# Allegro board backup.brd
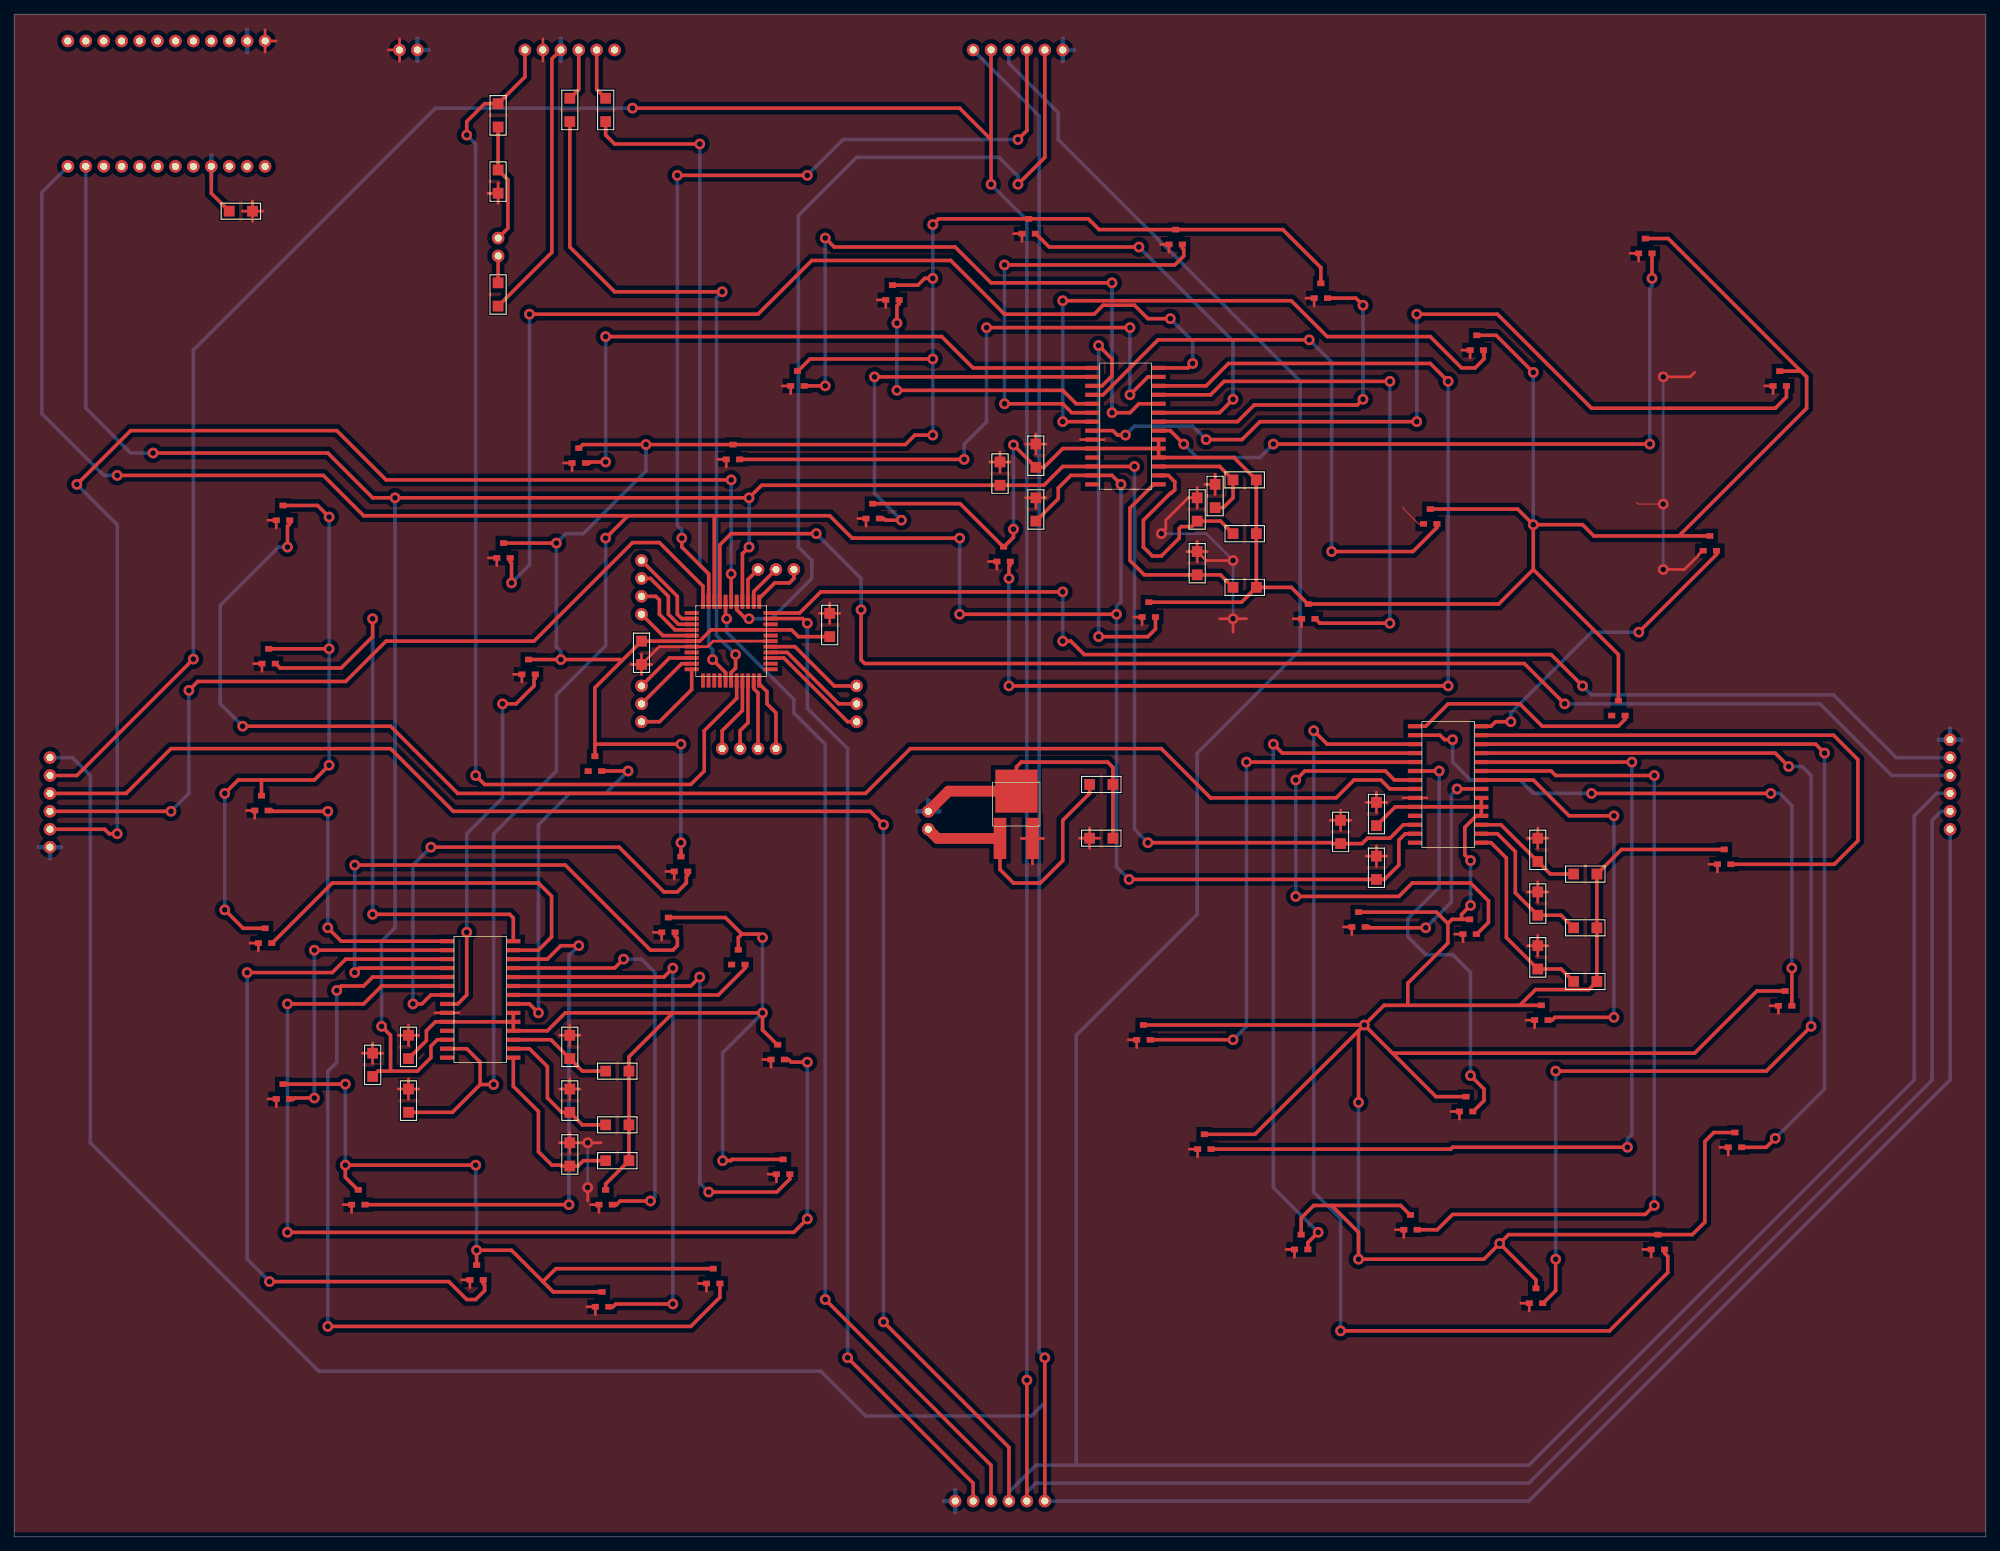
[diagram p0: board, top side]
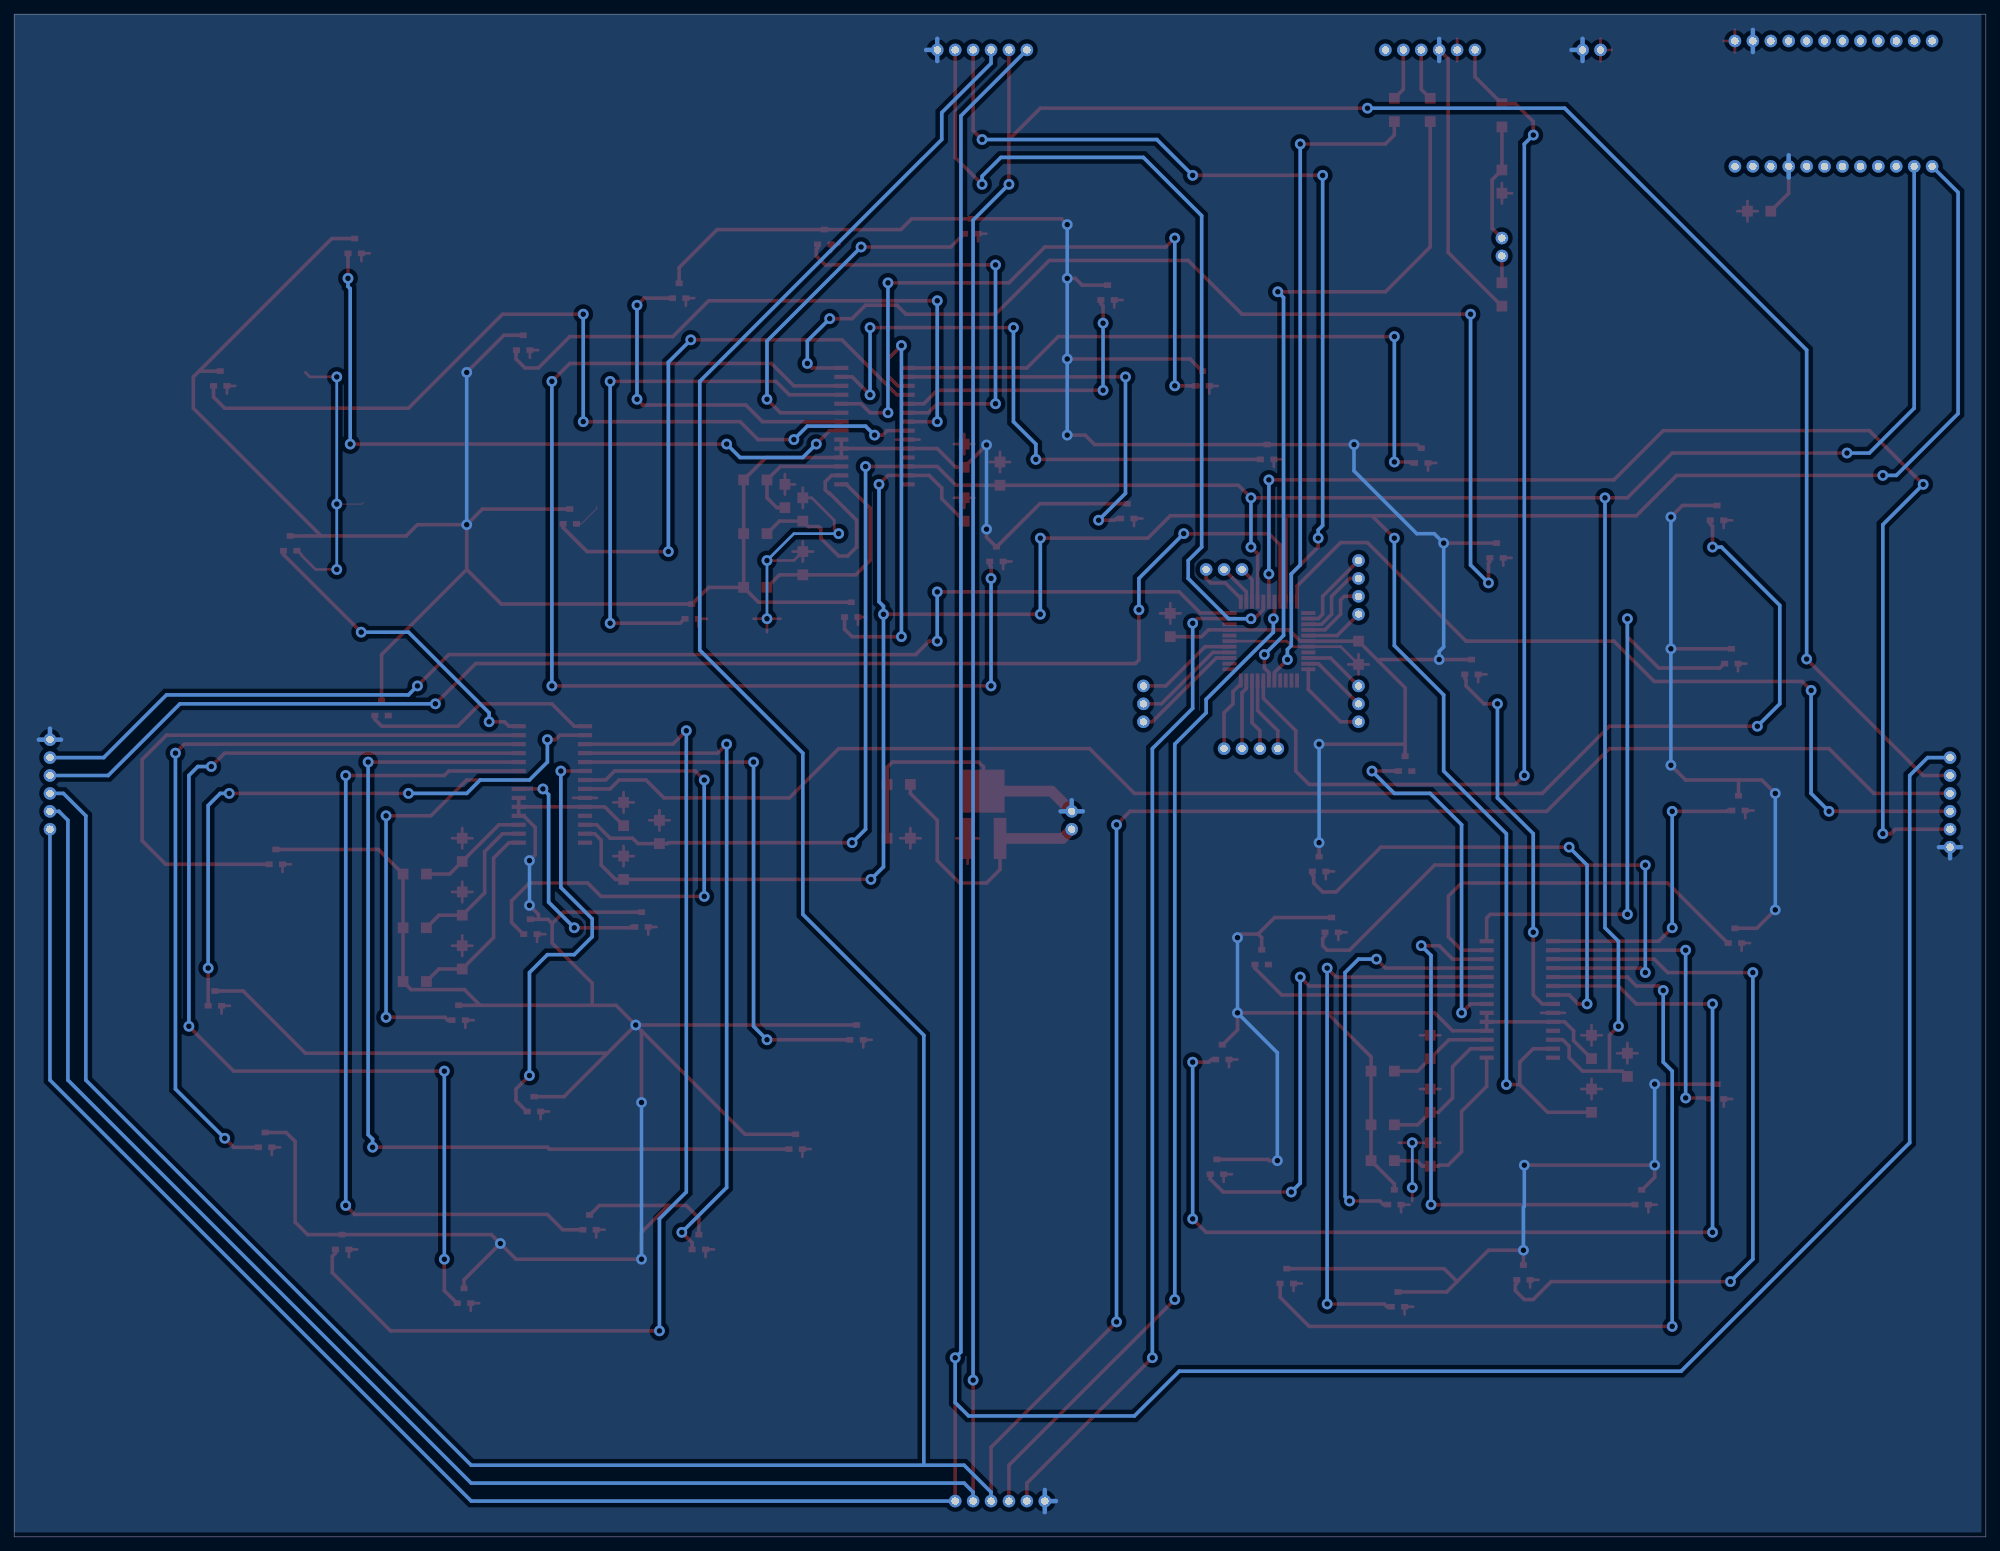
[diagram p1: board, bottom side, seen from below]

Outline 279.4 x 215.9 mm; copper layers: TOP, BOTTOM. Coordinates in mm from the lower left corner of the outline.
Outline path: 0,215.9 0,0 279.4,0 279.4,215.9 0,215.9

## Placement (name value [footprint] x y rotation side)
BT1  7.2V  [HEADER1X2]  129.54 101.6 180 top
C1  0.1 uF, 15V  [SMC1206]  115.57 127.64 90 top
C2  0.1 uF, 15V  [SMC1206]  88.9 127 270 top
C3  0.1uF  [SMC1206]  30.48 187.96 0 top
C4  0.1 uF, 15V  [SMC1206]  193.04 104.14 270 top
C5  0.1 uF, 15V  [SMC1206]  144.78 154.94 270 top
C6  0.1 uF, 15V  [SMC1206]  55.88 71.12 270 top
C7  0.1uF, 15V  [SMC1206]  152.4 106.68 0 top
C8  0.1uF, 15V  [SMC1206]  152.4 99.06 0 top
C9  0.1 uF, 15V  [SMC1206]  68.58 177.8 270 top
J1  CON3  [HEADER1X3]  106.68 137.16 90 top
J2  CON4  [HEADER1X4]  88.9 132.08 180 top
J3  CON3  [HEADER1X3]  119.38 119.38 0 top
J4  CON3  [HEADER1X3]  88.9 116.84 180 top
J5  CON4  [HEADER1X4]  106.68 111.76 270 top
J6  CON6  [HEADER1X6]  73.66 210.82 90 top
J7  JUMPER  [HEADER1X2]  68.58 182.88 180 top
J8  CON2  [HEADER1X2]  55.88 210.82 90 top
J9  Board Connector  [HEADER1X6]  5.08 109.22 0 top
J10  Board Connector  [HEADER1X6]  137.16 210.82 90 top
J11  Board Connector  [HEADER1X6]  274.32 101.6 180 top
J12  Board Connector  [HEADER1X6]  144.78 5.08 270 top
R1  22 ohm, 1/4W  [SMR1206]  83.82 200.66 90 top
R2  22 ohm, 1/4W  [SMR1206]  78.74 200.66 90 top
R3  10 kohm, 1/4W  [SMR1206]  68.58 190.5 90 top
R4  1 kohm, 1/4W  [SMR1206]  187.96 101.6 270 top
R5  1 kohm, 1/4W  [SMR1206]  139.7 152.4 270 top
R6  1 kohm, 1/4W  [SMR1206]  50.8 68.58 270 top
R7  220 ohm, 1/4W  [SMR1206]  68.58 203.2 270 top
R8  1 kohm, 1/4W  [SMR1206]  193.04 96.52 270 top
R9  1 kohm, 1/4W  [SMR1206]  144.78 147.32 270 top
R10  1 kohm, 1/4W  [SMR1206]  55.88 63.5 270 top
R11  1 kohm, 1/4W  [SMR1206]  215.9 99.06 270 top
R12  1 kohm, 1/4W  [SMR1206]  170.18 149.22 270 top
R13  1 kohm, 1/4W  [SMR1206]  78.74 71.12 270 top
R14  0 ohm, 1/4W  [SMR1206]  220.98 93.98 0 top
R15  0 ohm, 1/4W  [SMR1206]  172.72 149.86 0 top
R16  0 ohm, 1/4W  [SMR1206]  83.82 66.04 0 top
R17  1 kohm, 1/4W  [SMR1206]  215.9 91.44 270 top
R18  1 kohm, 1/4W  [SMR1206]  167.64 147.32 270 top
R19  1 kohm, 1/4W  [SMR1206]  78.74 63.5 270 top
R20  0 ohm, 1/4W  [SMR1206]  220.98 86.36 0 top
R21  0 ohm, 1/4W  [SMR1206]  172.72 142.24 0 top
R22  100 kohm, 1/4W  [SMR1206]  83.82 58.42 0 top
R23  1 kohm, 1/4W  [SMR1206]  215.9 83.82 270 top
R24  1 kohm, 1/4W  [SMR1206]  167.64 139.7 270 top
R25  1 kohm, 1/4W  [SMR1206]  78.74 55.88 270 top
R26  0 ohm, 1/4W  [SMR1206]  220.98 78.74 0 top
R27  100 kohm, 1/4W  [SMR1206]  172.72 134.62 0 top
R28  0 ohm, 1/4W  [SMR1206]  83.82 53.34 0 top
U1  -  [TCS40DPR]  38.1 145.03 0 top
U2  -  [TCS40DPR]  190.5 87.38 0 top
U3  -  [TCS40DPR]  250.19 164.08 0 top
U4  -  [TCS40DPR]  231.14 182.88 0 top
U5  -  [TCS40DPR]  72.9 123.19 0 top
U6  -  [TCS40DPR]  82.3 109.47 0 top
U7  -  [TCS40DPR]  206.25 86.36 0 top
U8  -  [TCS40DPR]  216.41 74.17 0 top
U9  -  [TCS40DPR]  207.26 169.16 0 top
U10  -  [TCS40DPR]  185.17 176.53 0 top
U11  -  [TCS40DPR]  94.49 95.25 0 top
U12  -  [TCS40DPR]  102.62 82.04 0 top
U13  PIC18F47K40-I/PT  [TQFPPIC18F47K40]  101.6 127 0 top
U14  -  [TCS40DPR]  205.74 61.21 0 top
U15  -  [TCS40DPR]  197.87 44.45 0 top
U16  -  [TCS40DPR]  164.59 184.15 0 top
U17  -  [TCS40DPR]  143.76 185.67 0 top
U18  -  [TCS40DPR]  108.2 68.58 0 top
U19  -  [TCS40DPR]  108.97 52.32 0 top
U20  -  [TCS40DPR]  160.02 71.37 0 top
U21  -  [TCS40DPR]  168.66 55.88 0 top
U22  -  [TCS40DPR]  124.46 176.28 0 top
U23  -  [TCS40DPR]  111 164.08 0 top
U24  -  [TCS40DPR]  99.06 36.83 0 top
U25  -  [TCS40DPR]  83.31 33.53 0 top
U26  -  [TCS40DPR]  182.37 41.66 0 top
U27  -  [TCS40DPR]  215.65 34.04 0 top
U28  -  [TCS40DPR]  200.66 144.53 0 top
U29  -  [TCS40DPR]  183.39 131.06 0 top
U30  -  [TCS40DPR]  92.71 86.61 0 top
U31  -  [TCS40DPR]  83.82 48.01 0 top
U32  -  [TCS40DPR]  232.92 41.66 0 top
U33  -  [TCS40DPR]  243.84 56.13 0 top
U34  -  [TCS40DPR]  160.78 131.32 0 top
U35  -  [TCS40DPR]  140.21 139.19 0 top
U36  -  [TCS40DPR]  65.53 37.34 0 top
U37  -  [TCS40DPR]  48.77 48.01 0 top
U38  -  [TCS40DPR]  250.95 76.2 0 top
U39  -  [TCS40DPR]  242.32 96.27 0 top
U40  -  [TCS40DPR]  121.67 145.29 0 top
U41  -  [TCS40DPR]  101.85 153.67 0 top
U42  -  [TCS40DPR]  38.1 62.99 0 top
U43  -  [TCS40DPR]  35.56 85.09 0 top
U45  -  [TCS40DPR]  227.33 117.35 0 top
U46  -  [TCS40DPR]  240.28 140.72 0 top
U47  -  [TCS40DPR]  80.01 153.16 0 top
U48  -  [TCS40DPR]  69.34 139.7 0 top
U49  -  [TCS40DPR]  35.05 103.89 0 top
U50  -  [TCS40DPR]  36.07 124.71 0 top
U51  MCP23017T  [MCP23017]  203.2 106.68 0 top
U52  MCP23017T  [MCP23017]  157.48 157.48 0 top
U53  MCP23017T  [MCP23017]  66.04 76.2 0 top
U54  MIC29310-5.0WU  [TO252AA]  139.7 99.06 0 top
U57  Photon  [PHOTONFOOTPRINT]  15.24 203.2 90 top

## Library data of the parts
BT1 = BATTERY
C1-C9 = CAP NP
J1 J3 J4 = CON3
J2 J5 = CON4
J6 = CON6
J7 = JUMPER
J8 = CON2
J9-J12 = Board Connector
R1-R28 = R
U1-U12 U14-U43 U45-U50 = TCS40DPR
U13 = PIC18F47K40-I/PT_0
U51-U53 = MCP23017T
U54 = MIC29310-5.0WU
U57 = Photon

## Footprints (pads in the part's own frame, mm; a bottom-side part is the same pattern mirrored in y, then rotated)
HEADER1X2
  round 1.778 hole 1.016: 1(0,1.27) 2(0,-1.27)
HEADER1X3
  round 1.778 hole 1.016: 1(0,1.27) 2(0,-1.27) 3(0,-3.81)
HEADER1X4
  round 1.778 hole 1.016: 1(0,1.27) 2(0,-1.27) 3(0,-3.81) 4(0,-6.35)
HEADER1X6
  round 1.778 hole 1.016: 1(0,1.27) 2(0,-1.27) 3(0,-3.81) 4(0,-6.35) 5(0,-8.89) 6(0,-11.43)
MCP23017
  rect 2x0.6 smd: 1(-4.699,8.255) 2(-4.699,6.985) 3(-4.699,5.715) 4(-4.699,4.445) 5(-4.699,3.175) 6(-4.699,1.905) 7(-4.699,0.635) 8(-4.699,-0.635) 9(-4.699,-1.905) 10(-4.699,-3.175) 11(-4.699,-4.445) 12(-4.699,-5.715) 13(-4.699,-6.985) 14(-4.699,-8.255) 15(4.699,-8.255) 16(4.699,-6.985) 17(4.699,-5.715) 18(4.699,-4.445) 19(4.699,-3.175) 20(4.699,-1.905) 21(4.699,-0.635) 22(4.699,0.635) 23(4.699,1.905) 24(4.699,3.175) 25(4.699,4.445) 26(4.699,5.715) 27(4.699,6.985) 28(4.699,8.255)
PHOTONFOOTPRINT
  round 1.778 hole 1.016: 1(8.89,7.62) 2(8.89,5.08) 3(8.89,2.54) 4(8.89,0) 5(8.89,-2.54) 6(8.89,-5.08) 7(8.89,-7.62) 8(8.89,-10.16) 9(8.89,-12.7) 10(8.89,-15.24) 11(8.89,-17.78) 12(8.89,-20.32) 13(-8.89,7.62) 14(-8.89,5.08) 15(-8.89,2.54) 16(-8.89,0) 17(-8.89,-2.54) 18(-8.89,-5.08) 19(-8.89,-7.62) 20(-8.89,-10.16) 21(-8.89,-12.7) 22(-8.89,-15.24) 23(-8.89,-17.78) 24(-8.89,-20.32)
SMC1206
  rect 1.524x1.524 smd: 1(0,0) 2(3.302,0)
SMR1206
  rect 1.524x1.524 smd: 1(0,0) 2(3.302,0)
TCS40DPR
  rect 1x0.8 smd: 1(-0.95,-0.9) 2(0.95,-0.9) 3(0,1.2)
TO252AA
  rect 1.778x5.842 smd: 1(-0.004,-0.034) 3(4.596,-0.034)
  rect 5.969x6.096 smd: 2(2.332,6.673)
TQFPPIC18F47K40
  rect 2x0.55 smd: 1(-5.588,3.988) 2(-5.588,3.2) 3(-5.588,2.388) 4(-5.588,1.6) 5(-5.588,0.787) 6(-5.588,0) 7(-5.588,-0.787) 8(-5.588,-1.6) 9(-5.588,-2.388) 10(-5.588,-3.2) 11(-5.588,-3.988) 23(5.588,-3.988) 24(5.588,-3.2) 25(5.588,-2.388) 26(5.588,-1.6) 27(5.588,-0.787) 28(5.588,0) 29(5.588,0.787) 30(5.588,1.6) 31(5.588,2.388) 32(5.588,3.2) 33(5.588,3.988)
  rect 0.55x2 smd: 12(-3.988,-5.588) 13(-3.2,-5.588) 14(-2.388,-5.588) 15(-1.6,-5.588) 16(-0.787,-5.588) 17(0,-5.588) 18(0.787,-5.588) 19(1.6,-5.588) 20(2.388,-5.588) 21(3.2,-5.588) 22(3.988,-5.588) 34(3.988,5.588) 35(3.2,5.588) 36(2.388,5.588) 37(1.6,5.588) 38(0.787,5.588) 39(0,5.588) 40(-0.787,5.588) 41(-1.6,5.588) 42(-2.388,5.588) 43(-3.2,5.588) 44(-3.988,5.588)

## Nets
GND: BT1.2(-) C1.1 C2.1 C3.1 C4.2 C5.2 C6.2 C7.2 C8.2 C9.2 J6.3 J8.2 J9.6(GND) J10.6(GND) J11.6(GND) J12.6(GND) R14.2 R15.2 R16.2 R20.2 R21.2 R22.2 R26.2 R27.2 R28.2 U1.3(GND) U2.3(GND) U3.3(GND) U4.3(GND) U5.3(GND) U6.3(GND) U7.3(GND) U8.3(GND) U9.3(GND) U10.3(GND) U11.3(GND) U12.3(GND) U13.6(VSS_0) U13.30(VSS_1) U14.3(GND) U15.3(GND) U16.3(GND) U17.3(GND) U18.3(GND) U19.3(GND) U20.3(GND) U21.3(GND) U22.3(GND) U23.3(GND) U24.3(GND) U25.3(GND) U26.3(GND) U27.3(GND) U28.3(GND) U29.3(GND) U30.3(GND) U31.3(GND) U32.3(GND) U33.3(GND) U34.3(GND) U35.3(GND) U36.3(GND) U37.3(GND) U38.3(GND) U39.3(GND) U40.3(GND) U41.3(GND) U42.3(GND) U43.3(GND) U45.3(GND) U46.3(GND) U47.3(GND) U48.3(GND) U49.3(GND) U50.3(GND) U51.10(VSS) U51.18(RESET) U51.19(INTB) U51.20(INTA) U52.10(VSS) U52.18(RESET) U52.19(INTB) U52.20(INTA) U53.10(VSS) U53.18(RESET) U53.19(INTB) U53.20(INTA) U54.2(GND) U57.11 U57.21
5 V: C1.2 C2.2 C3.2 C4.1 C5.1 C6.1 C8.1 J6.2 J8.1 R3.1 R4.1 R5.1 R6.1 R8.1 R9.1 R10.1 R11.1 R12.1 R13.1 R17.1 R18.1 R19.1 R23.1 R24.1 R25.1 U1.1(VCC) U2.1(VCC) U3.1(VCC) U4.1(VCC) U5.1(VCC) U6.1(VCC) U7.1(VCC) U8.1(VCC) U9.1(VCC) U10.1(VCC) U11.1(VCC) U12.1(VCC) U13.7(VDD_0) U13.28(VDD_1) U14.1(VCC) U15.1(VCC) U16.1(VCC) U17.1(VCC) U18.1(VCC) U19.1(VCC) U20.1(VCC) U21.1(VCC) U22.1(VCC) U23.1(VCC) U24.1(VCC) U25.1(VCC) U26.1(VCC) U27.1(VCC) U28.1(VCC) U29.1(VCC) U30.1(VCC) U31.1(VCC) U32.1(VCC) U33.1(VCC) U34.1(VCC) U35.1(VCC) U36.1(VCC) U37.1(VCC) U38.1(VCC) U39.1(VCC) U40.1(VCC) U41.1(VCC) U42.1(VCC) U43.1(VCC) U45.1(VCC) U46.1(VCC) U47.1(VCC) U48.1(VCC) U49.1(VCC) U50.1(VCC) U51.9(VDD) U52.9(VDD) U53.9(VDD) U54.3(OUT) U57.12
CD1: J9.5(CD) U13.39(RD0)
CD2: J10.5(CD) U13.38(RD1)
CD3: J11.5(CD) U13.33(RA6)
CD4: J12.5(CD) U13.32(RA7)
ICSPCLK: R1.1 U13.16(ICSPCLK/RB6)
ICSPDAT: R2.1 U13.17(ICSPDAT/RB7)
MCLR/VPP: J6.1 R7.1 U13.18(VPP/MCLR/RE3)
SCK: R4.2 R5.2 R6.2 U13.37(RC3) U51.12(SCK) U52.12(SCK) U53.12(SCK) U57.14
SCK1: J9.1(SCK) J10.1(SCK) J11.1(SCK) J12.1(SCK)
SDA: R8.2 R9.2 R10.2 U13.42(RC4) U51.13(SDA) U52.13(SDA) U53.13(SDA) U57.13
SDI1: J9.2(SDI) J10.2(SDI) J11.2(SDI) J12.2(SDI)
SDO1: J9.3(SDO) J10.3(SDO) J11.3(SDO) J12.3(SDO)
SS1: J9.4(SS) U13.44(RC6)
SS2: J10.4(SS) U13.43(RC5)
SS3: J11.4(SS) U13.41(RD3)
SS4: J12.4(SS) U13.40(RD2)
N40578: U6.2(VOUT) U53.21(GPA0)
N40604: U12.2(VOUT) U53.22(GPA1)
N40612: U19.2(VOUT) U53.23(GPA2)
N40620: U25.2(VOUT) U53.24(GPA3)
N40628: U31.2(VOUT) U53.25(GPA4)
N40636: U37.2(VOUT) U53.26(GPA5)
N40644: U43.2(VOUT) U53.27(GPA6)
N40652: U50.2(VOUT) U53.28(GPA7)
N41000: R19.2 R22.1 U53.16(A1)
N41020: R25.2 R28.1 U53.15(A0)
N41032: R13.2 R16.1 U53.17(A2)
N41290: U1.2(VOUT) U51.8(GPB7)
N41302: U7.2(VOUT) U51.7(GPB6)
N41314: U14.2(VOUT) U51.6(GPB5)
N41326: U20.2(VOUT) U51.5(GPB4)
N41338: U26.2(VOUT) U51.4(GPB3)
N41350: U32.2(VOUT) U51.3(GPB2)
N41362: U38.2(VOUT) U51.2(GPB1)
N41374: U45.2(VOUT) U51.1(GPB0)
N41442: U2.2(VOUT) U51.21(GPA0)
N41446: U8.2(VOUT) U51.22(GPA1)
N41450: U15.2(VOUT) U51.23(GPA2)
N41454: U21.2(VOUT) U51.24(GPA3)
N41458: U27.2(VOUT) U51.25(GPA4)
N41462: U33.2(VOUT) U51.26(GPA5)
N41466: U39.2(VOUT) U51.27(GPA6)
N41734: U46.2(VOUT) U51.28(GPA7)
N42242: R17.2 R20.1 U51.16(A1)
N42246: R23.2 R26.1 U51.15(A0)
N42268: R11.2 R14.1 U51.17(A2)
N42276: R24.2 R27.1 U52.15(A0)
N42308: R18.2 R21.1 U52.16(A1)
N42508: J7.2 R3.2 R7.2
N42712: U3.2(VOUT) U52.8(GPB7)
N42740: U9.2(VOUT) U52.7(GPB6)
N42752: U16.2(VOUT) U52.6(GPB5)
N42772: U22.2(VOUT) U52.5(GPB4)
N42784: U28.2(VOUT) U52.4(GPB3)
N42796: U34.2(VOUT) U52.3(GPB2)
N42808: U40.2(VOUT) U52.2(GPB1)
N42820: U47.2(VOUT) U52.1(GPB0)
N42884: U4.2(VOUT) U52.21(GPA0)
N42896: U10.2(VOUT) U52.22(GPA1)
N42900: U17.2(VOUT) U52.23(GPA2)
N42904: U23.2(VOUT) U52.24(GPA3)
N42908: U29.2(VOUT) U52.25(GPA4)
N42912: U35.2(VOUT) U52.26(GPA5)
N42916: U41.2(VOUT) U52.27(GPA6)
N43192: U48.2(VOUT) U52.28(GPA7)
N43224: C9.1 J7.1
N43624: R12.2 R15.1 U52.17(A2)
N43852: U5.2(VOUT) U53.8(GPB7)
N43864: U11.2(VOUT) U53.7(GPB6)
N43876: U18.2(VOUT) U53.6(GPB5)
N43888: U24.2(VOUT) U53.5(GPB4)
N43900: U30.2(VOUT) U53.4(GPB3)
N43912: U36.2(VOUT) U53.3(GPB2)
N43924: U42.2(VOUT) U53.2(GPB1)
N43936: U49.2(VOUT) U53.1(GPB0)
N104053: BT1.1(+) C7.1 U54.1(IN)
N111887: J6.4 R2.2
N111889: J6.5 R1.2
N118143: J3.1 U13.27(RE2)
N118150: J3.2 U13.26(RE1)
N118163: J3.3 U13.25(RE0)
N118167: J5.1 U13.22(RA3)
N118185: J5.4 U13.19(RA0)
N118192: J2.4 U13.2(RD4)
N118196: J2.3 U13.3(RD5)
N118203: J2.2 U13.4(RD6)
N118215: J2.1 U13.5(RD7)
N118227: J4.3 U13.9(RB0)
N118234: J4.2 U13.10(RB1)
N118238: J4.1 U13.11(RB2)
N118679: J1.1 U13.36(RC2)
N118686: J1.2 U13.35(RC1)
N118690: J1.3 U13.34(RC0)
N128561: J5.2 U13.21(RA2)
N128579: J5.3 U13.20(RA1)

Pads without a net: J6 6; U13 1 8 12 13 14 15 23 24 29 31; U51 11 14; U52 11 14; U53 11 14; U57 1 2 3 4 5 6 7 8 9 10 15 16 17 18 19 20 22 23 24

## Via types
v1: diameter 1.524, hole 0.8, TOP to BOTTOM, 195 vias

## Routing (per net, layer and track width the routed paths; a pad name or vN(x,y) marks a point on that pad's centre or on a via; arc(x,y) is an arc through that point)
GND: length 1504.7
  TOP w0.508: v1(130.18,186.06) 130.99,186.87 U17.3 152.22,186.87 153.74,185.35 U16.3 179.78,185.35 185.17,179.96 U10.3 ; U43.3 32.46,86.29 v1(29.84,88.9) ; v1(106.05,84.96) 105.54,85.47 103.12,85.47 ; R27.2 180.97,134.62 183.33,132.26 U29.3 210.37,132.26 215.26,137.16 ; R27.2 173.92,132.52 U34.3 ; R27.2 R21.2 R15.2 172.85,153.03 U52.18 U52.19 ; U21.3 175.82,57.08 190.5,71.75 ; 235.9,141.92 254,160.02 254,164.47 253.18,165.28 ; 235.9,141.92 U46.3 ; 235.9,141.92 223.84,141.92 222.25,143.51 v1(215.26,143.51) ; U53.19 59.69,73.03 58.42,71.75 58.42,70.36 C6.2 ; U53.19 U53.20 ; U53.19 U53.18 75.56,71.75 78.11,74.3 93.34,74.3 ; 74.93,36.19 70.48,40.64 v1(65.53,40.64) U36.3 ; 74.93,36.19 76.4,34.73 U25.3 ; 74.93,36.19 76.77,38.03 U24.3 ; 253.18,165.28 U3.3 ; 253.18,165.28 234.39,184.08 U4.3 ; U12.3 102.62,84.96 103.12,85.47 ; U5.3 v1(77.47,124.39) 85.8,124.39 86.04,124.14 ; v1(65.41,52.7) v1(46.93,52.7) 46.93,50.98 48.71,49.21 U37.3 ; v1(191.32,72.57) 194.11,75.37 197.49,75.37 ; v1(191.32,72.57) U20.3 ; v1(191.32,72.57) 195.31,68.58 ; v1(191.32,72.57) 190.5,71.75 ; 207.9,103.5 U51.18 207.2,102.23 205.57,100.6 205.57,96.69 v1(206.38,95.89) ; 207.9,103.5 U51.20 ; 207.9,103.5 195.71,103.5 C4.2 ; U31.3 83.82,50.04 R28.2 R22.2 R16.2 87.12,68.07 93.34,74.3 ; U8.3 213.36,75.37 ; 213.36,75.37 215.59,77.6 223.14,77.6 R26.2 R20.2 R14.2 227.77,97.47 U39.3 ; 213.36,75.37 197.49,75.37 ; U28.3 213.05,145.73 v1(215.26,143.51) ; U30.3 100.78,87.81 103.12,85.47 ; U27.3 215.65,36.45 v1(210.5,41.59) ; U23.3 111.06,165.28 112.78,167 v1(130.18,167) ; 86.04,124.14 82.29,120.39 82.29,112.39 ; 86.04,124.14 C2.1 U13.6 97.14,127 98.74,128.6 U13.30 110.16,128.6 111.12,127.64 C1.1 ; v1(215.26,143.51) 215.26,137.16 ; 82.29,112.39 v1(94.49,112.39) ; 82.29,112.39 82.29,111.21 82.3,111.21 U6.3 ; U26.3 182.37,45.21 184.15,46.99 186.69,46.99 ; 215.26,137.16 227.33,125.09 U45.3 ; v1(210.5,41.59) 211.77,42.86 U32.3 237.8,42.86 239.58,44.63 239.58,56.06 240.85,57.33 U33.3 ; v1(210.5,41.59) 208.28,39.37 v1(190.5,39.37) 190.5,43.18 186.69,46.99 ; 197.49,75.37 197.49,78.51 203.16,84.18 203.16,86.96 ; U52.19 U52.20 ; U52.19 U52.10 148.59,154.31 145.92,151.64 C5.2 v1(141.6,154.81) ; v1(44.63,125.91) U50.3 ; 190.5,71.75 v1(190.5,61.59) ; C3.1 27.94,190.5 U57.21 ; 186.69,46.99 196.47,46.99 197.81,45.65 U15.3 ; U2.3 201.55,88.58 203.16,86.96 ; U14.3 201.48,62.41 195.31,68.58 ; 205.1,87.56 203.76,87.56 203.16,86.96 ; 205.1,87.56 205.1,88.27 v1(206.38,89.53) ; 205.1,87.56 U7.3 ; 35.05,107.31 U49.3 ; 35.05,107.31 31.75,107.31 v1(29.84,105.41) ; 35.05,107.31 42.55,107.31 v1(44.63,109.4) ; U22.3 128.07,177.48 129.03,178.44 v1(130.18,178.44) ; C9.2 76.2,182.12 76.2,209.55 J6.3 ; C8.2 C7.2 155.7,109.09 154.94,109.86 142.73,109.86 142.03,109.16 U54.2 ; U19.3 101.73,53.52 101.54,53.34 v1(100.4,53.34) ; U18.3 108.14,69.78 106.05,71.88 v1(106.05,74.3) 93.34,74.3 ; v1(44.63,144.6) 43,146.23 U1.3 ; U9.3 210,170.36 v1(215.26,165.1) ; U11.3 v1(94.49,98.42) ; v1(76.83,140.9) U48.3 ; v1(141.6,142.88) 141.6,141.73 140.27,140.39 U35.3 140.15,140.39 134.05,146.49 U40.3 ; U38.3 246.94,77.4 238.12,68.58 195.31,68.58 ; v1(130.18,156.21) 127.64,156.21 126.29,154.87 U41.3 v1(89.53,154.87) 80.58,154.87 80.07,154.36 U47.3 ; U42.3 v1(46.93,64.19)
  TOP w1.524: BT1.2 132.4,105.73 U54.2
  BOTTOM w0.508: v1(130.18,156.21) v1(130.18,167) v1(130.18,178.44) v1(130.18,186.06) ; v1(77.47,124.39) 77.47,125.53 76.83,126.17 v1(76.83,140.9) 78.18,142.24 80.64,142.24 89.53,151.13 v1(89.53,154.87) ; v1(141.6,154.81) v1(141.6,142.88) ; v1(206.38,89.53) v1(206.38,95.89) ; v1(106.05,84.96) v1(106.05,74.3) 100.4,68.65 v1(100.4,53.34) ; v1(65.41,52.7) 65.41,46.86 65.53,46.74 v1(65.53,40.64) ; v1(29.84,88.9) v1(29.84,105.41) ; v1(94.49,98.42) v1(94.49,112.39) ; v1(215.26,143.51) v1(215.26,165.1) ; v1(44.63,144.6) v1(44.63,125.91) v1(44.63,109.4) ; v1(46.93,64.19) v1(46.93,52.7) ; v1(190.5,39.37) v1(190.5,61.59)
  BOTTOM w0.635: 5.08,96.21 J9.6 ; J9.6 6.66,97.79 ; J9.6 3.5,97.79 ; 148.59,209.24 J10.6 ; J10.6 148.59,212.4 ; J10.6 150.17,210.82 ; BT1.2 129.54,104.45 ; BT1.2 127.96,102.87 ; BT1.2 131.12,102.87 ; J11.6 275.9,113.03 ; J11.6 272.74,113.03 ; J11.6 274.32,114.61 ; 33.02,213.67 U57.11 33.02,210.51 ; 77.47,209.24 J6.3 77.47,212.4 ; J8.2 57.15,212.4 ; J8.2 57.15,209.24 ; J8.2 58.73,210.82 ; J12.6 133.35,6.66 ; J12.6 133.35,3.5 ; J12.6 131.77,5.08 ; 27.94,192.73 U57.21 27.94,195.89
5 V: length 370.1
  TOP w0.127: 229.87,146.69 230.12,146.43 v1(233.68,146.43) ; 196.85,146.05 196.85,145.8 199.02,143.63 U28.1
  TOP w0.381: 35.96,62.09 U42.1 37.15,61.01 ; 206.31,167.18 U9.1 205.13,168.26 ; 181.42,39.67 U26.1 180.24,40.76 ; 214.7,32.05 U27.1 213.51,33.14 ; 107.25,66.59 U18.1 106.07,67.68 ; 139.26,137.21 U35.1 138.07,138.29 ; 74.93,212.4 J6.2 74.93,209.24 ; 231.97,39.67 U32.1 230.78,40.76 ; 34.1,101.9 U49.1 32.92,102.99 ; 88.9,122.25 C2.2 ; C2.2 88.9,125.15 ; C2.2 91.41,126.21 U13.7 98.27,126.21 99.06,127 U13.28 ; C2.2 87.45,123.7 ; C2.2 90.35,123.7 ; 193.04,95.07 R8.1 ; R8.1 193.04,97.97 ; R8.1 191.59,96.52 ; R8.1 194.49,96.52 ; 205.3,84.37 U7.1 204.11,85.46 ; R3.1 68.58,191.95 ; R3.1 68.58,189.05 ; R3.1 67.13,190.5 ; C1.2 115.57,132.39 ; C1.2 115.57,129.49 ; C1.2 117.02,130.94 ; C1.2 114.12,130.94 ; 108.02,50.34 U19.1 106.83,51.42 ; 167.64,138.25 R24.1 ; R24.1 169.09,139.7 ; R24.1 167.64,141.15 ; R24.1 168.91,138.43 v1(172.72,138.43) ; R24.1 166.19,139.7 ; R13.1 78.74,72.57 ; R13.1 77.29,71.12 ; R13.1 78.74,69.67 ; R13.1 80.19,71.12 ; 35.12,122.73 U50.1 33.93,123.81 ; 141.63,184.77 U17.1 142.81,183.69 ; 144.78,145.87 R9.1 ; R9.1 146.23,147.32 ; R9.1 143.33,147.32 ; 215.9,89.99 R17.1 ; R17.1 214.45,91.44 ; R17.1 217.35,91.44 ; R17.1 215.9,92.89 ; 46.63,47.11 U37.1 47.82,46.02 ; R11.1 217.35,99.06 ; R11.1 215.9,97.61 ; R11.1 215.9,100.51 ; R11.1 214.45,99.06 ; R25.1 v1(81.28,55.88) 83.19,55.88 ; R25.1 78.74,54.43 ; R25.1 78.74,57.33 ; R25.1 77.29,55.88 ; 196.81,104.78 U51.9 200.19,104.78 ; 100.9,151.68 U41.1 99.72,152.77 ; 82.36,31.54 U25.1 81.18,32.63 ; C4.1 194.49,104.14 ; C4.1 193.04,102.69 ; C4.1 193.04,105.59 ; C4.1 191.59,104.14 ; 81.68,47.11 U31.1 82.87,46.02 ; 214.45,83.82 R23.1 ; R23.1 215.9,82.37 ; R23.1 217.35,83.82 ; R23.1 215.9,85.27 ; v1(172.72,130.18) 174.62,130.18 ; v1(172.72,130.18) 172.72,128.27 ; v1(172.72,130.18) 170.81,130.18 ; C5.1 146.23,154.94 ; C5.1 144.78,156.39 ; C5.1 144.78,153.49 ; C5.1 143.33,154.94 ; 188.36,86.48 U2.1 189.55,85.39 ; 150.95,99.06 C8.1 ; C8.1 153.85,99.06 ; C8.1 152.4,100.51 ; C8.1 152.4,97.61 ; 35.56,210.51 U57.12 ; U57.12 37.14,212.09 ; U57.12 35.56,213.67 ; 71.95,121.2 U5.1 70.76,122.29 ; 186.51,101.6 R4.1 ; R4.1 189.41,101.6 ; R4.1 187.96,103.05 ; R4.1 187.96,100.15 ; 54.61,209.24 J8.1 ; J8.1 54.61,212.4 ; J8.1 53.03,210.82 ; 55.88,69.67 C6.1 ; C6.1 57.33,71.12 ; C6.1 55.88,72.57 ; C6.1 54.43,71.12 ; 167.71,53.89 U21.1 166.52,54.98 ; 34.61,83.1 U43.1 33.42,84.19 ; 163.64,182.16 U16.1 162.46,183.25 ; 183.03,175.63 U10.1 184.22,174.54 ; 241.7,55.23 U33.1 242.89,54.15 ; 142.72,99.03 U54.3 ; U54.3 144.3,95.42 ; U54.3 145.87,99.03 ; 240.18,95.37 U39.1 241.37,94.28 ; 248.05,163.18 U3.1 249.24,162.1 ; 37.15,143.05 U1.1 35.96,144.13 ; 54.43,63.5 R10.1 ; R10.1 55.88,64.95 ; R10.1 57.33,63.5 ; R10.1 55.88,62.05 ; 170.18,147.78 R12.1 ; R12.1 170.18,150.67 ; R12.1 168.73,149.22 ; 196.92,42.46 U15.1 195.73,43.55 ; 167.64,145.87 R18.1 ; R18.1 166.37,147.32 163.19,144.15 163.19,142.88 v1(162.56,142.24) ; R18.1 167.64,148.77 ; 68.39,137.71 U48.1 67.21,138.8 ; 159.83,129.33 U34.1 158.65,130.42 ; 215.46,72.18 U8.1 214.27,73.27 ; 50.8,67.13 R6.1 ; R6.1 50.8,70.03 ; R6.1 49.35,68.58 ; R6.1 52.25,68.58 ; 157.88,70.47 U20.1 159.07,69.39 ; 119.53,144.39 U40.1 120.72,143.3 ; U46.1 239.23,139.82 238.7,139.28 238.7,139.18 236.68,137.16 v1(233.68,137.16) ; 32.33,187.96 C3.2 ; C3.2 33.78,186.51 ; C3.2 33.78,189.41 ; C3.2 35.23,187.96 ; 138.25,152.4 R5.1 ; R5.1 139.7,150.95 ; R5.1 139.7,153.85 ; R5.1 141.15,152.4 ; 90.57,85.71 U30.1 91.76,84.63 ; 203.6,60.31 U14.1 204.79,59.23 ; 122.32,175.38 U22.1 123.51,174.29 ; 238.12,165.1 237.49,164.47 v1(233.68,164.47) ; 77.87,152.26 U47.1 79.06,151.18 ; 250,74.21 U38.1 248.82,75.3 ; R19.1 80.19,63.5 ; R19.1 77.29,63.5 ; R19.1 78.74,64.95 ; R19.1 78.74,62.05 ; 64.58,35.35 U36.1 63.4,36.44 ; 154.47,155.57 U52.9 151.09,155.57 ; 230.19,180.89 U4.1 229,181.98 ; 96.92,35.93 U24.1 98.11,34.84 ; 92.35,94.35 U11.1 93.54,93.26 ; 108.86,163.18 U23.1 110.05,162.1 ; 181.25,130.16 U29.1 182.44,129.08 ; 59.65,74.3 63.03,74.3 ; v1(81.28,49.53) 81.28,47.62
  BOTTOM w0.381: v1(233.68,137.16) v1(233.68,146.43) v1(233.68,164.47) ; v1(162.56,142.24) 168.91,142.24 v1(172.72,138.43) v1(172.72,130.18) ; v1(81.28,55.88) v1(81.28,49.53)
CD1: length 177.7
  TOP w0.508: U13.39 v1(101.6,136.53) ; v1(101.6,149.86) 52.7,149.86 45.72,156.84 16.51,156.84 v1(8.89,149.22) ; J9.5 12.83,100.33 13.46,99.69 v1(14.61,99.69)
  BOTTOM w0.508: v1(8.89,149.22) 14.61,143.51 v1(14.61,99.69) ; v1(101.6,136.53) v1(101.6,149.86)
CD2: length 124.3
  TOP w0.508: U13.38 102.39,131.46 103.67,130.18 v1(104.14,130.18) ; J10.5 146.05,195.58 v1(142.24,191.77)
  BOTTOM w0.508: v1(142.24,191.77) 142.24,192.91 139.57,195.58 119.38,195.58 111.12,187.32 111.12,140.34 113.03,138.43 113.03,135.89 107.31,130.18 v1(104.14,130.18)
CD3: length 182.2
  TOP w0.508: v1(222.25,120.65) 217.81,125.09 151.64,125.09 149.73,127 v1(148.59,127) ; U13.33 111.3,130.99 114.3,133.99 v1(148.59,133.99)
  BOTTOM w0.508: v1(222.25,120.65) 223.52,119.38 257.81,119.38 266.7,110.49 J11.5 ; v1(148.59,127) v1(148.59,133.99)
CD4: length 139.7
  TOP w0.508: v1(112.39,129.54) 111.73,130.2 U13.32 ; v1(118.11,25.4) 135.89,7.62 J12.5
  BOTTOM w0.508: v1(112.39,129.54) 112.39,117.47 118.11,111.76 v1(118.11,25.4)
ICSPCLK: length 93.4
  TOP w0.508: v1(98.98,124.38) 100.81,122.54 U13.16 ; R1.1 83.82,198.75 85.09,197.49 v1(97.16,197.49)
  BOTTOM w0.508: v1(97.16,197.49) 97.16,137.79 98.42,136.53 98.42,126.36 98.98,125.81 v1(98.98,124.38)
ICSPDAT: length 98.8
  TOP w0.508: v1(102.23,125.09) 102.23,123.18 101.6,122.54 U13.17 ; R2.1 78.74,182.88 85.09,176.53 v1(100.33,176.53)
  BOTTOM w0.508: v1(102.23,125.09) 99.52,127.81 99.52,175.72 v1(100.33,176.53)
MCLR/VPP: length 156.4
  TOP w0.508: v1(64.14,198.75) 64.14,200.66 66.67,203.2 R7.1 72.39,207.01 J6.1 ; U13.18 102.39,118.9 97.79,114.3 97.79,108.58 95.89,106.68 66.67,106.68 v1(65.41,107.95)
  BOTTOM w0.508: v1(64.14,198.75) 65.41,197.49 v1(65.41,107.95)
SCK: length 394.5
  TOP w0.508: 53.34,66.04 53.34,71.12 v1(52.07,72.39) ; 53.34,66.04 51.56,66.04 R6.2 ; 53.34,66.04 57.15,66.04 59.05,67.94 59.05,69.58 59.96,70.48 61.34,70.48 ; v1(160.66,98.42) 186.69,98.42 186.82,98.3 R4.2 191.01,98.3 191.77,99.06 194.94,99.06 196.85,100.97 U51.12 ; U13.37 103.2,139.4 v1(104.14,140.34) ; v1(158.75,151.76) U52.12 148.59,151.76 145.92,149.1 R5.2 105.92,149.1 v1(104.14,147.32) v1(53.98,147.32) 50.8,147.32 44.45,153.67 v1(19.68,153.67)
  BOTTOM w0.508: v1(160.66,98.42) 158.75,100.33 v1(158.75,151.76) ; v1(19.68,153.67) 16.51,153.67 10.16,160.02 U57.14 ; v1(53.98,147.32) 53.98,86.36 52.07,84.45 v1(52.07,72.39) ; v1(104.14,147.32) v1(104.14,140.34)
SCK1: length 615.8
  TOP w0.508: J12.1 v1(146.05,25.4)
  BOTTOM w0.508: J11.1 274.32,64.77 214.63,5.08 J12.1 ; J9.1 8.26,110.49 10.79,107.95 10.79,55.88 43.18,23.5 114.3,23.5 120.65,17.14 144.15,17.14 146.05,19.05 v1(146.05,25.4) 145.24,26.21 145.24,201.47 J10.1
SDA: length 448.5
  TOP w0.508: 87,144.78 49.53,144.78 43.81,150.5 v1(14.61,150.5) ; 87,144.78 v1(83.82,141.6) ; 87,144.78 99.21,144.78 ; U13.42 99.21,144.78 ; 99.21,144.78 115.57,144.78 118.75,141.6 v1(133.99,141.6) ; 66.04,64.14 62.1,60.2 R10.2 ; 66.04,64.14 66.04,67.31 64.14,69.22 61.34,69.22 ; 66.04,64.14 v1(67.94,64.14) ; v1(156.84,149.22) 155.57,150.5 149.73,150.5 147.96,148.72 147.96,147.19 R9.2 ; U51.13 197.12,99.69 196.22,98.79 196.22,95.25 194.18,93.22 R8.2 v1(157.99,93.22) ; v1(133.99,130.81) v1(156.21,130.81)
  BOTTOM w0.508: v1(83.82,141.6) 83.82,126.36 76.83,119.38 76.83,108.58 67.94,99.69 v1(67.94,64.14) ; U57.13 3.94,190.63 3.94,159.26 12.7,150.5 v1(14.61,150.5) ; v1(156.84,149.22) 156.84,132.59 156.21,131.95 v1(156.21,130.81) 156.21,95 v1(157.99,93.22) ; v1(133.99,141.6) v1(133.99,130.81)
SDI1: length 601.5
  TOP w0.508: v1(138.43,191.77) 138.43,198.12 ; 138.43,198.12 J10.2 ; 138.43,198.12 133.99,202.56 v1(87.63,202.56) ; J9.2 8.89,107.95 v1(25.4,124.46) ; J12.2 v1(143.51,22.23)
  BOTTOM w0.508: v1(143.51,22.23) 143.51,186.69 v1(138.43,191.77) ; v1(87.63,202.56) 59.69,202.56 25.4,168.28 v1(25.4,124.46) ; J11.2 273.05,102.87 271.78,101.6 271.78,64.77 214.63,7.62 144.78,7.62 143.51,6.35 J12.2
SDO1: length 657
  TOP w0.508: J9.3 15.88,105.41 22.23,111.76 53.34,111.76 62.23,102.87 121.28,102.87 v1(123.19,100.97) ; v1(123.19,30.48) 140.97,12.7 J12.3
  BOTTOM w0.508: 150.5,10.16 214.63,10.16 269.24,64.77 269.24,102.23 272.42,105.41 J11.3 ; 150.5,10.16 144.78,10.16 140.97,6.35 J12.3 ; 150.5,10.16 150.5,71.12 167.64,88.27 167.64,111.12 182.25,125.73 182.25,163.83 147.96,198.12 147.96,201.93 140.97,208.91 J10.3 ; v1(123.19,100.97) v1(123.19,30.48)
SS1: length 121.6
  TOP w0.508: U13.44 97.61,134.8 91.44,140.97 87.63,140.97 73.66,127 52.7,127 46.99,121.28 26.04,121.28 v1(24.77,120.02) ; v1(22.23,102.87) J9.4
  BOTTOM w0.508: v1(22.23,102.87) 24.77,105.41 v1(24.77,120.02)
SS2: length 125.9
  TOP w0.508: v1(112.39,193.04) v1(93.98,193.04) ; U13.43 98.4,133.72 98.42,133.74 98.42,136.53 94.61,140.34 v1(94.61,141.6) ; J10.4 143.51,199.39 v1(142.24,198.12)
  BOTTOM w0.508: v1(94.61,141.6) 94.61,142.75 93.98,143.38 v1(93.98,193.04) ; v1(112.39,193.04) 117.47,198.12 v1(142.24,198.12)
SS3: length 204
  TOP w0.508: v1(120.02,131.44) 120.02,124.33 120.52,123.83 214,123.83 v1(219.71,118.11) ; v1(113.67,142.24) 101.6,142.24 100,140.64 U13.41
  BOTTOM w0.508: J11.4 266.06,107.95 255.91,118.11 v1(219.71,118.11) ; v1(120.02,131.44) 120.02,135.89 v1(113.67,142.24)
SS4: length 143.1
  TOP w0.508: J12.4 138.43,10.16 v1(114.94,33.66) ; v1(100.97,130.18) 100.81,130.33 U13.40
  BOTTOM w0.508: v1(100.97,130.18) 100.97,128.27 110.49,118.75 110.49,116.84 114.94,112.4 v1(114.94,33.66)
N40578: length 50.4
  TOP w0.508: v1(87,108.58) 83.85,108.58 83.84,108.57 U6.2 ; U53.21 73.03,75.56 v1(74.3,74.3)
  BOTTOM w0.508: v1(74.3,74.3) 74.3,100.97 78.74,105.41 83.82,105.41 v1(87,108.58)
N40604: length 34.9
  TOP w0.508: U12.2 103.57,80.61 99.79,76.83 U53.22
N40612: length 70.9
  TOP w0.508: v1(97.16,79.38) 95.89,78.11 U53.23 ; U19.2 109.92,50.73 108.08,48.9 v1(98.42,48.9)
  BOTTOM w0.508: v1(97.16,79.38) 97.16,50.16 v1(98.42,48.9)
N40620: length 80
  TOP w0.508: U25.2 84.85,32.63 85.24,33.02 v1(93.34,33.02) ; v1(93.34,80.64) 92.08,79.38 U53.24
  BOTTOM w0.508: v1(93.34,80.64) v1(93.34,33.02)
N40628: length 59.6
  TOP w0.508: U31.2 85.36,47.11 85.88,47.62 v1(90.17,47.62) ; 70.74,80.64 85.09,80.64 v1(86.36,81.92)
  BOTTOM w0.508: v1(86.36,81.92) 88.9,81.92 90.81,80.01 90.81,48.26 v1(90.17,47.62)
N40636: length 76.3
  TOP w0.508: U37.2 v1(78.62,47.11) ; v1(80.01,83.82) 77.47,83.82 75.56,81.92 U53.26
  BOTTOM w0.508: v1(80.01,83.82) 78.62,82.43 v1(78.62,47.11)
N40644: length 55.9
  TOP w0.508: U43.2 36.57,84.19 45.09,92.71 74.3,92.71 76.16,90.85 76.16,85.05 74.3,83.19 U53.27
N40652: length 83.8
  TOP w0.508: v1(50.8,88.27) 70.23,88.27 70.74,87.76 U53.28 ; U50.2 37.08,123.81 37.7,123.19 46.35,123.19 50.8,127.64 v1(50.8,130.18)
  BOTTOM w0.508: v1(50.8,88.27) v1(50.8,130.18)
N41000: length 20.2
  TOP w0.508: U53.16 73.03,69.22 75.56,66.67 75.56,62.23 77.6,60.2 R19.2 80.52,58.42 R22.1
N41020: length 25.5
  TOP w0.508: R28.1 80.64,53.34 79.88,52.58 R25.2 77.6,52.58 77.47,52.7 76.2,52.7 74.3,54.61 74.3,60.33 70.74,63.88 70.74,67.94
N41032: length 14.9
  TOP w0.508: R16.1 80.52,66.04 R13.2 76.07,70.48 U53.17
N41290: length 212.5
  TOP w0.508: v1(32.38,114.94) 53.34,114.94 62.87,105.41 120.65,105.41 127,111.76 162.56,111.76 169.54,104.78 187.32,104.78 189.87,107.31 193.68,107.31 194.94,106.05 U51.8 ; v1(38.73,140.34) 38.73,143.29 39.05,143.6 U1.2
  BOTTOM w0.508: v1(38.73,140.34) 37.47,140.34 29.21,132.08 29.21,118.11 v1(32.38,114.94)
N41302: length 69.1
  TOP w0.508: U7.2 207.26,85.46 208.91,87.12 208.91,90.17 206.38,92.71 198.12,92.71 196.22,90.81 v1(181.61,90.81) ; U51.7 195.58,107.31 194.31,108.58 182.88,108.58 v1(181.61,107.31)
  BOTTOM w0.508: v1(181.61,107.31) v1(181.61,90.81)
N41314: length 60.9
  TOP w0.508: v1(206.38,65.41) 208.28,63.5 208.28,61.84 206.75,60.31 U14.2 ; 198.5,108.58 v1(201.93,108.58)
  BOTTOM w0.508: v1(206.38,65.41) 206.38,80.01 203.84,82.55 200.03,82.55 197.49,85.09 197.49,87.63 201.93,92.08 v1(201.93,108.58)
N41326: length 75.8
  TOP w0.508: U51.5 v1(174.62,109.86) ; v1(172.72,70.48) 161.57,70.48 161.56,70.47 U20.2
  BOTTOM w0.508: v1(174.62,109.86) 174.62,72.39 v1(172.72,70.48)
N41338: length 95.5
  TOP w0.508: v1(178.44,112.39) 179.71,111.12 U51.4 ; U26.2 183.32,41.72 v1(184.78,43.18)
  BOTTOM w0.508: v1(184.78,43.18) 178.44,49.53 v1(178.44,112.39)
N41350: length 155.1
  TOP w0.508: U51.3 186.06,112.39 v1(184.15,114.3) ; v1(187.96,29.21) 226.06,29.21 234.31,37.47 234.31,39.78 233.87,40.22 U32.2
  BOTTOM w0.508: v1(187.96,29.21) 187.96,45.09 184.15,48.9 v1(184.15,114.3)
N41362: length 87.8
  TOP w0.508: v1(248.92,105.41) v1(223.52,105.41) ; U38.2 v1(251.9,80.64) ; v1(203.84,113.03) 202.69,113.03 202.06,113.67 U51.2
  BOTTOM w0.508: v1(203.84,113.03) 203.84,109.86 206.38,107.31 213.36,107.31 215.26,105.41 v1(223.52,105.41) ; v1(248.92,105.41) 250.19,105.41 251.9,103.7 v1(251.9,80.64)
N41374: length 33.3
  TOP w0.508: U45.2 228.28,115.92 227.3,114.94 216.53,114.94 213.36,118.11 203.2,118.11 200.03,114.94 U51.1
N41442: length 33.6
  TOP w0.508: v1(200.03,86.36) 192.16,86.36 192.04,86.48 U2.2 ; U51.21 v1(204.47,106.05)
  BOTTOM w0.508: v1(204.47,106.05) 203.66,105.24 203.66,90 v1(200.03,86.36)
N41446: length 59
  TOP w0.508: v1(226.69,73.66) 218.34,73.66 217.95,73.27 U8.2 ; v1(226.69,102.23) 220.34,102.23 215.26,107.31 U51.22
  BOTTOM w0.508: v1(226.69,102.23) v1(226.69,73.66)
N41450: length 120.8
  TOP w0.508: v1(232.41,46.99) 231.14,45.72 203.84,45.72 201.67,43.55 U15.2 ; 207.9,108.58 217.81,108.58 218.44,107.95 v1(232.41,107.95)
  BOTTOM w0.508: v1(232.41,107.95) v1(232.41,46.99)
N41454: length 135.3
  TOP w0.508: U51.24 v1(229.24,109.86) ; U21.2 203.57,54.98 203.84,55.24 v1(228.6,55.24)
  BOTTOM w0.508: v1(229.24,109.86) 229.24,57.02 228.6,56.39 v1(228.6,55.24)
N41458: length 156.1
  TOP w0.508: v1(218.44,66.04) 248.28,66.04 v1(254.63,72.39) ; v1(218.44,39.37) 218.44,34.92 216.66,33.14 U27.2 ; v1(251.46,109.22) 249.56,111.12 U51.25
  BOTTOM w0.508: v1(218.44,66.04) v1(218.44,39.37) ; v1(254.63,72.39) 254.63,107.95 253.37,109.22 v1(251.46,109.22)
N41462: length 112
  TOP w0.508: v1(256.54,111.12) 255.27,112.39 U51.26 ; v1(249.56,56.52) 248.27,55.23 U33.2
  BOTTOM w0.508: v1(249.56,56.52) 256.54,63.5 v1(256.54,111.12)
N41466: length 85.7
  TOP w0.508: U39.2 257.93,95.37 261.26,98.7 261.26,110.21 257.81,113.67 U51.27
N41734: length 44.7
  TOP w0.508: v1(212.09,115.57) 209.91,115.57 209.28,114.94 U51.28 ; U46.2 241.23,139.28 v1(230.22,128.27)
  BOTTOM w0.508: v1(230.22,128.27) 223.52,128.27 212.09,116.84 v1(212.09,115.57)
N42242: length 22
  TOP w0.508: R20.1 219.2,88.14 R17.2 212.72,91.31 212.72,97.16 210.19,99.69 U51.16
N42246: length 27.8
  TOP w0.508: R26.1 219.2,80.52 R23.2 211.46,84.96 211.46,96.25 209.28,98.42 207.9,98.42
N42268: length 16
  TOP w0.508: R14.1 217.68,93.98 R11.2 210.69,100.97 U51.17
N42276: length 29.1
  TOP w0.508: R27.1 170.94,136.4 R24.2 160.15,136.4 158.12,138.43 158.12,145.86 161.48,149.22 U52.15
N42308: length 30.6
  TOP w0.508: 162.18,150.5 163.56,150.5 164.47,149.59 164.47,148.46 163.96,147.96 163.83,147.96 160.02,144.15 160.02,140.34 161.29,139.06 162.56,139.06 165.1,141.6 165.1,142.96 165.37,143.24 166.86,143.24 R18.2 170.94,144.02 R21.1
N42508: length 16.9
  TOP w0.508: R7.2 R3.2 69.96,192.42 69.96,185.53 J7.2
N42712: length 124
  TOP w0.508: v1(198.75,173.35) 210.19,173.35 223.52,160.02 249.56,160.02 251.14,161.6 U3.2 ; v1(198.75,158.12) 176.53,158.12 173.99,155.57 v1(168.91,155.57) ; U52.8 155.7,156.84 156.34,156.21 v1(157.48,156.21)
  BOTTOM w0.508: v1(168.91,155.57) 167,157.48 158.75,157.48 v1(157.48,156.21) ; v1(198.75,158.12) v1(198.75,173.35)
N42740: length 86.8
  TOP w0.508: U9.2 208.21,167.73 208.28,167.67 208.28,167 207.01,165.74 205.1,165.74 200.66,170.18 186.06,170.18 180.97,175.26 v1(148.59,175.26) ; 152.78,158.12 v1(148.59,158.12)
  BOTTOM w0.508: v1(148.59,158.12) v1(148.59,175.26)
N42752: length 60.3
  TOP w0.508: U52.6 149.86,159.38 148.59,160.66 v1(140.34,160.66) ; U16.2 165.54,182.72 165.74,182.53 165.74,181.61 164.47,180.34 v1(140.34,180.34)
  BOTTOM w0.508: v1(140.34,160.66) v1(140.34,180.34)
N42772: length 41.4
  TOP w0.508: v1(125.09,172.09) 125.09,174.53 125.41,174.84 U22.2 ; U52.5 150.5,160.66 148.59,162.56 v1(125.09,162.56)
  BOTTOM w0.508: v1(125.09,162.56) v1(125.09,172.09)
N42784: length 82.2
  TOP w0.508: U28.2 201.61,143.09 198.21,139.7 v1(186.69,139.7) ; v1(183.51,169.72) 162.1,169.72 154.31,161.93 U52.4
  BOTTOM w0.508: v1(183.51,169.72) 186.69,166.54 v1(186.69,139.7)
N42796: length 60
  TOP w0.508: U34.2 161.73,128.71 160.66,127.64 v1(153.67,127.64) ; U52.3 154.16,163.19 155.57,164.61 155.57,167 v1(153.67,168.91)
  BOTTOM w0.508: v1(153.67,168.91) v1(153.67,127.64)
N42808: length 56
  TOP w0.508: U40.2 123.21,144.39 123.45,144.15 v1(125.73,144.15) ; U52.2 v1(121.92,164.47)
  BOTTOM w0.508: v1(125.73,144.15) 121.92,147.96 v1(121.92,164.47)
N42820: length 91.5
  TOP w0.508: v1(83.82,152.4) 81.69,152.4 81.55,152.26 U47.2 ; 152.78,165.74 135.89,165.74 131.44,170.18 v1(83.82,170.18)
  BOTTOM w0.508: v1(83.82,170.18) v1(83.82,152.4)
N42884: length 99.1
  TOP w0.508: U52.21 163.83,156.84 v1(165.74,154.94) ; v1(231.78,154.94) v1(178.44,154.94) ; U4.2 v1(232.09,178.44)
  BOTTOM w0.508: v1(178.44,154.94) 176.53,153.03 167.64,153.03 v1(165.74,154.94) ; v1(231.78,154.94) 231.78,176.98 232.09,177.29 v1(232.09,178.44)
N42896: length 49
  TOP w0.508: v1(191.13,161.29) 190.33,160.48 175.72,160.48 173.35,158.12 162.18,158.12 ; v1(191.13,174.62) 190.13,175.63 U10.2
  BOTTOM w0.508: v1(191.13,161.29) v1(191.13,174.62)
N42900: length 53.9
  TOP w0.508: U52.23 170.81,159.38 v1(172.72,161.29) ; v1(159.38,182.88) 146.67,182.88 144.77,184.77 U17.2
  BOTTOM w0.508: v1(159.38,182.88) 172.72,169.54 v1(172.72,161.29)
N42904: length 92.8
  TOP w0.508: v1(155.57,159.38) 158.12,159.38 159.38,160.66 U52.24 ; v1(114.94,184.15) 116.2,182.88 133.35,182.88 138.43,177.8 v1(155.57,177.8) ; v1(114.94,163.19) 112.55,163.19 112.54,163.18 U23.2
  BOTTOM w0.508: v1(114.94,184.15) v1(114.94,163.19) ; v1(155.57,159.38) v1(155.57,177.8)
N42908: length 78.7
  TOP w0.508: v1(194.94,163.83) 171.45,163.83 169.54,161.93 U52.25 ; U29.2 184.4,130.16 185.02,129.54 v1(194.94,129.54)
  BOTTOM w0.508: v1(194.94,163.83) v1(194.94,129.54)
N42912: length 166.5
  TOP w0.508: v1(203.2,120.65) v1(140.97,120.65) ; U35.2 141.16,137.76 140.97,137.57 v1(140.97,135.89) ; U52.26 168.91,163.19 172.09,166.37 200.66,166.37 v1(203.2,163.83)
  BOTTOM w0.508: v1(140.97,120.65) v1(140.97,135.89) ; v1(203.2,163.83) v1(203.2,120.65)
N42916: length 86.8
  TOP w0.508: U52.27 160.66,164.47 v1(158.12,161.93) ; v1(158.12,171.45) v1(137.79,171.45) ; v1(134.62,152.77) U41.2
  BOTTOM w0.508: v1(137.79,171.45) 137.79,158.12 134.62,154.94 v1(134.62,152.77) ; v1(158.12,171.45) v1(158.12,161.93)
N43192: length 154
  TOP w0.508: v1(70.48,135.25) 70.48,138.08 70.29,138.27 U48.2 ; v1(73.03,173.35) 105.41,173.35 113.03,180.97 132.72,180.97 140.34,173.35 153.03,173.35 154.31,174.62 158.75,174.62 160.66,172.72 v1(163.83,172.72) ; v1(167,166.37) 166.37,165.74 162.18,165.74
  BOTTOM w0.508: v1(167,166.37) 167,169.54 v1(163.83,172.72) ; v1(73.03,173.35) 73.03,137.79 v1(70.48,135.25)
N43224: length 3.8
  TOP w0.508: J7.1 C9.1
N43624: length 17
  TOP w0.508: R12.2 171.32,145.92 172.72,147.32 R15.1 170.81,151.76 U52.17
N43852: length 53.9
  TOP w0.508: 61.34,75.56 62.87,75.56 64.14,76.83 v1(64.14,85.72) ; U5.2 73.85,121.76 73.66,121.57 73.66,120.65 71.12,118.11 v1(69.22,118.11)
  BOTTOM w0.508: v1(64.14,85.72) 64.14,99.69 69.22,104.78 v1(69.22,118.11)
N43864: length 69.7
  TOP w0.508: v1(56.52,75.56) 57.78,75.56 59.05,76.83 61.34,76.83 ; U11.2 95.44,93.82 95.25,93.63 95.25,92.71 93.98,91.44 92.08,91.44 85.72,97.79 v1(59.05,97.79)
  BOTTOM w0.508: v1(56.52,75.56) 56.52,95.25 v1(59.05,97.79)
N43876: length 156.1
  TOP w0.508: 61.34,78.11 52.07,78.11 49.53,75.56 v1(38.73,75.56) ; v1(112.39,67.31) 110.12,67.31 109.75,67.68 U18.2 ; v1(38.73,43.18) 110.49,43.18 v1(112.39,45.09)
  BOTTOM w0.508: v1(112.39,45.09) v1(112.39,67.31) ; v1(38.73,75.56) v1(38.73,43.18)
N43888: length 123.8
  TOP w0.508: U24.2 100.01,33.97 95.89,29.84 v1(44.45,29.84) ; 61.34,79.38 50.8,79.38 49.53,78.11 46.35,78.11 v1(45.72,77.47)
  BOTTOM w0.508: v1(44.45,29.84) 44.45,66.04 45.72,67.31 v1(45.72,77.47)
N43900: length 81.6
  TOP w0.508: v1(48.26,95.25) 78.11,95.25 90.17,83.19 93.34,83.19 93.98,83.82 93.98,84.86 93.66,85.18 U30.2 ; v1(48.26,80.01) 48.9,80.64 61.34,80.64
  BOTTOM w0.508: v1(48.26,80.01) v1(48.26,95.25)
N43912: length 107.9
  TOP w0.508: v1(33.02,80.01) 45.09,80.01 46.99,81.92 61.34,81.92 ; U36.2 66.48,35.91 66.67,35.71 66.67,34.92 65.41,33.66 64.14,33.66 61.59,36.2 v1(36.2,36.2)
  BOTTOM w0.508: v1(36.2,36.2) 33.02,39.37 v1(33.02,80.01)
N43924: length 43.3
  TOP w0.508: U42.2 39.64,62.09 39.78,62.23 v1(42.55,62.23) ; 61.34,83.19 v1(42.55,83.19)
  BOTTOM w0.508: v1(42.55,83.19) v1(42.55,62.23)
N43936: length 42.7
  TOP w0.508: 61.34,84.45 46.35,84.45 v1(44.45,86.36) ; v1(44.45,102.87) 36.71,102.87 36.59,102.99 U49.2
  BOTTOM w0.508: v1(44.45,86.36) v1(44.45,102.87)
N104053: length 38.5
  TOP w0.508: U54.1 139.7,94.62 141.6,92.71 145.41,92.71 148.59,95.89 148.59,101.6 152.4,105.41 C7.1
  TOP w1.524: BT1.1 130.84,99.03 U54.1
N111887: length 7.4
  TOP w0.508: R2.2 80.01,205.23 J6.4
N111889: length 7.4
  TOP w0.508: J6.5 82.55,205.23 R1.2
N118143: length 14.5
  TOP w0.508: J3.1 116.2,120.65 110.64,126.21 U13.27
N118150: length 15.2
  TOP w0.508: J3.2 116.84,118.11 109.55,125.4 U13.26
N118163: length 15.9
  TOP w0.508: U13.25 109.07,124.61 118.11,115.57 J3.3
N118167: length 10.6
  TOP w0.508: U13.22 105.59,120.94 106.68,119.84 106.68,118.11 107.95,116.84 J5.1
N118185: length 10.8
  TOP w0.508: J5.4 100.33,114.3 103.2,117.17 U13.19
N118192: length 12
  TOP w0.508: U13.2 94.59,130.2 93.98,130.81 93.98,133.35 J2.4
N118196: length 11.3
  TOP w0.508: U13.3 94.13,129.39 92.71,130.81 92.71,133.35 90.17,135.89 J2.3
N118203: length 10.3
  TOP w0.508: U13.4 93.65,128.6 91.44,130.81 91.44,132.84 90.93,133.35 J2.2
N118215: length 8.4
  TOP w0.508: J2.1 91.92,127.79 U13.5
N118227: length 8.8
  TOP w0.508: U13.9 92.86,124.61 J4.3
N118234: length 9.5
  TOP w0.508: U13.10 94.59,123.8 J4.2
N118238: length 11.9
  TOP w0.508: J4.1 91.44,115.57 96.01,120.14 U13.11
N118679: length 5.2
  TOP w0.508: U13.36 103.99,135.74 J1.1
N118686: length 5.9
  TOP w0.508: J1.2 104.8,134.01 U13.35
N118690: length 7.8
  TOP w0.508: J1.3 110.49,135.89 109.86,135.25 107.78,135.25 105.59,133.06 U13.34
N128561: length 9.9
  TOP w0.508: J5.2 105.41,119.67 104.8,120.28 U13.21
N128579: length 10.1
  TOP w0.508: U13.20 103.99,115.42 102.87,114.3 J5.3

## Copper pours and planes (outline as drawn; the poured copper is in the pictures)
GND on BOTTOM: 279.4,215.9 279.4,0.64 0.64,0.64 0.64,215.9 ; 7 cut-outs
5 V on TOP: 279.4,215.9 279.4,0.64 0,0.64 0,215.9 ; 19 cut-outs
